# Altium PCB PFC.PcbDoc
Units mil, origin at the board's own origin, x right, y up, seen from the top; angles counter-clockwise.
Board outline 1350.03 x 910.03 mil, 2 copper layers (Top Layer, Bottom Layer); 21 components, 14 nets, 66 pads, 0 vias.
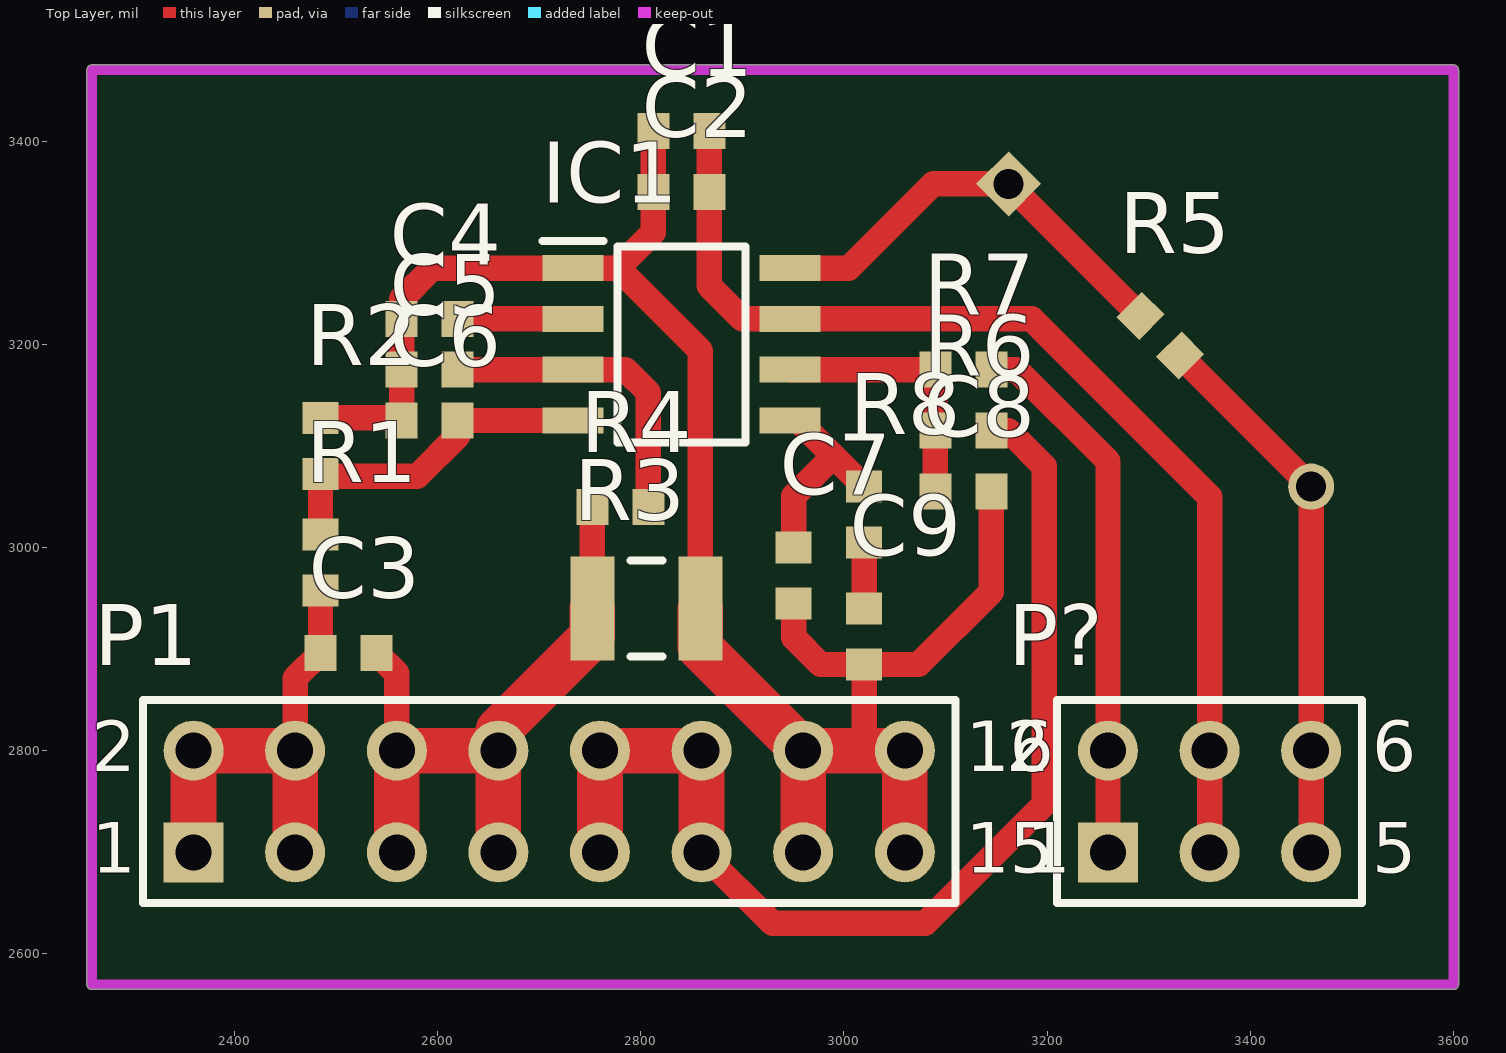
[diagram p0: Top Layer view]
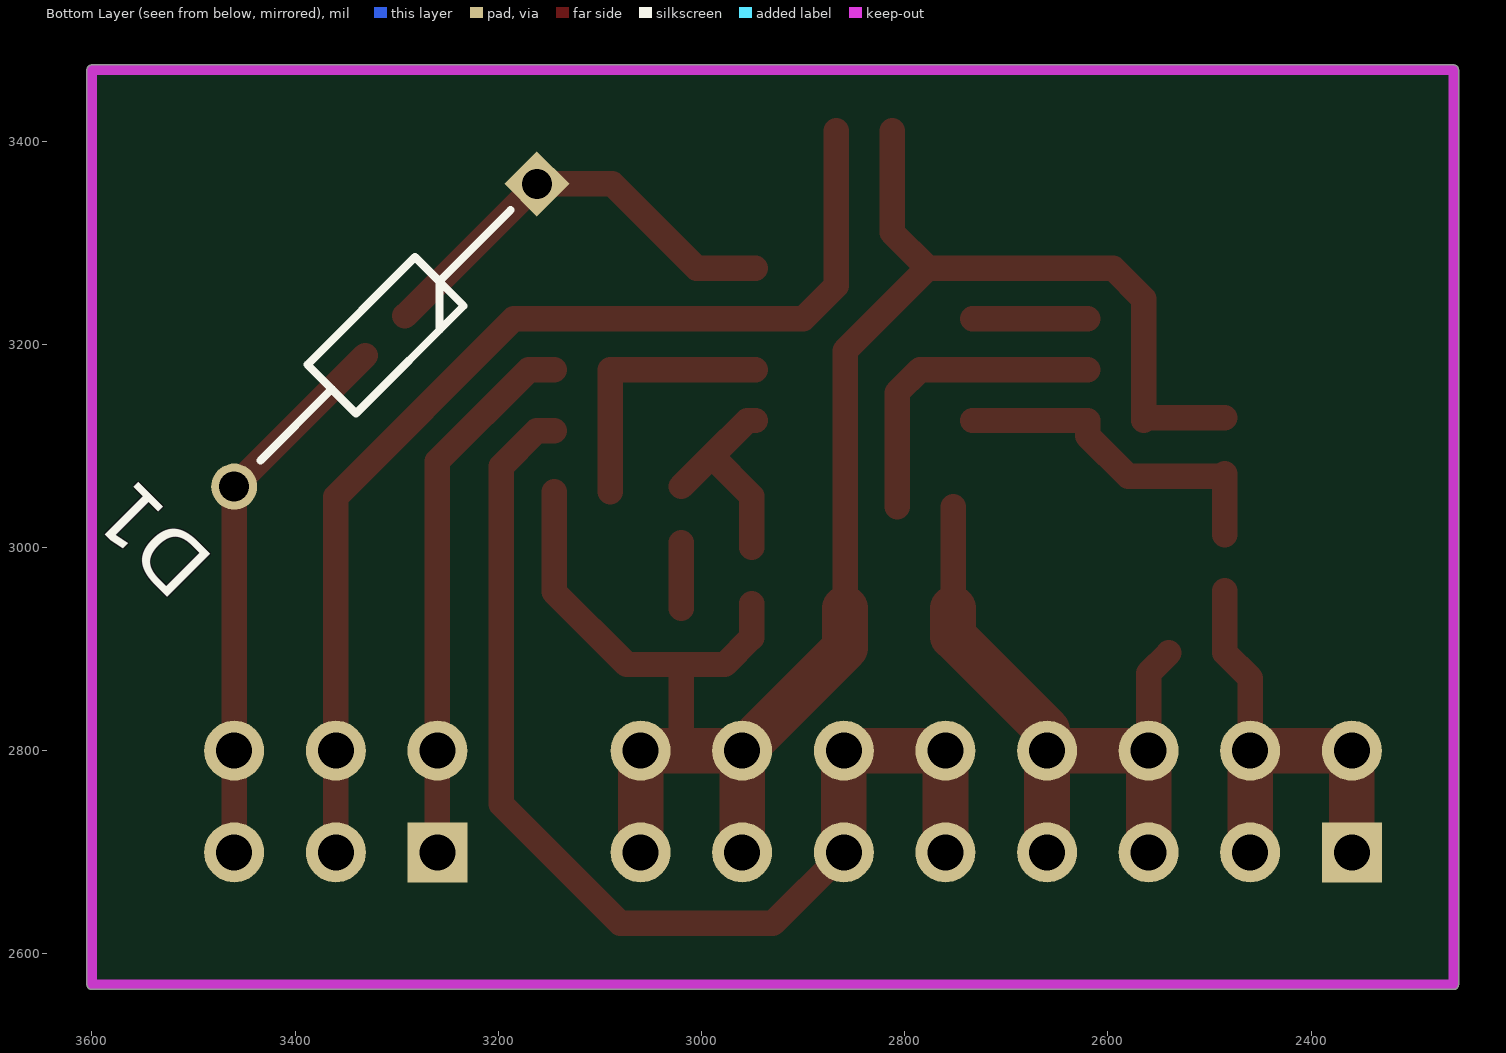
[diagram p1: Bottom Layer view, seen from below]

## Layer stack, top to bottom
Top Solder: solder mask 0.4, Solder Resist, Dk 3.5
Top Layer: signal copper 1.4
Dielectric 1: dielectric 12.6, FR-4, Dk 4.8
Bottom Layer: signal copper 1.4
Bottom Solder: solder mask 0.4, Solder Resist, Dk 3.5

## Board outline
2260,2564.99 cw(c2260,2570) 2254.99,2570 2254.99,3470 cw(c2260,3470) 2260,3475.01 3600,3475.01 cw(c3600,3470) 3605.01,3470 3605.01,2570 cw(c3600,2570) 3600,2564.99

## Design rules (kind name [scope] priority, off if disabled: settings)
Clearance [All] p1: gap=10 ignorepadtopadclearanceinfootprint=FALSE except(0: Arc-Hole Track-Hole SMDPad-Hole THPad-Hole Via-Hole Fill-Hole Poly-Hole Region-Hole Text-Hole)
PolygonConnect [All] p1: connectstyle=Relief reliefconductorwidth=10 reliefentries=4 polygonreliefangle="90 Angle" airgapwidth=10
RoomDefinition PFC [InComponentClass('PFC')] p1: confinementstyle=ConfineIn formatcopy=TRUE lockcomponents=FALSE outline 2260,2570 3600,2570 3600,3470 2260,3470
RoutingVias [All] p1: holewidth=28 width=50 viastyle="Through Hole" minholewidth=28 minwidth=50 maxholewidth=28 maxwidth=50
SolderMaskExpansion [All] p1: expansion=4
Width [All] p1: maxlimit=50 minlimit=10 preferedwidth=25 bottomlayer_maxwidth=10 bottomlayer_prefwidth=10 minimp=50.000000 maximp=50.000000 favimp=50.000000
30 further rules are at their usual default settings.

## Components (designator, comment, footprint, x,y, rotation, side; value= is the part's Value field where it differs from the comment)
C1 "Cap" 1608[0603] 2840,3410 r0 top value=0.01uF
C2 "Cap" 1608[0603] 2840,3350 r0 top value=10uF
C3 "Cap" 1608[0603] 2512.44,2896.26 r180 top value=102
C4 "Cap" 1608[0603] 2592.44,3225 r0 top value=1100pF
C5 "Cap" 1608[0603] 2592.44,3175 r0 top value=1000pF
C6 "Cap" 1608[0603] 2592.44,3125 r0 top value=100pF
C7 "Cap" 1608[0603] 2950.71,2972.44 r90 top value=0.33uF
C8 "Cap" 1608[0603] 3117.56,3055 r180 top value=820pF
C9 "Cap Pol1" 1608[0603] 3020,2912.44 r270 top value=3.3uF
D1 "1N4148" DIOAD1068W53L380D172 3162.12,3357.88 r315 bottom
IC1 "UCC28019D" SOIC127P600X175-8N 2840.12,3200 r0 top
P1 "Header 8X2" HDR2X8 2360,2700 r0 top
P? "Header 3X2" HDR2X3 3260,2700 r0 top
R1 "Res1" 1608[0603] 2484.88,2985 r90 top value=1.8M
R2 "Res1" 1608[0603] 2484.88,3100 r90 top value=100K
R3 "Res1" C1210 2805.59,2940 r180 top value=50m
R4 "Res1" 1608[0603] 2780,3040 r180 top value=220
R5 "Res1" 1608[0603] 3311.51,3208.49 r315 top value=3R3
R6 "Res1" 1608[0603] 3117.56,3115 r0 top value=3R3
R7 "Res1" 1608[0603] 3117.56,3175 r180 top value=3R3
R8 "Res1" 1608[0603] 3020,3032.44 r90 top value=47K

## Footprints (in the part's own frame and the unit in brackets; to place one, negate y for a bottom-side part, rotate by r counter-clockwise, add the part's x,y. Pads: shape width x height; smd on the part's side, far side on the other; paste and mask are expansions set on the pad)
1608[0603] [mm] "Chip Capacitor, Body 1.6x0.8mm, IPC High Density"
  rect 0.8x0.9 smd: 1(-0.7,0) 2(0.7,0)
  body extent -0.87,-0.48 0.87,0.48, height 1.3
C1210 [mm] "Chip Capacitor, Body 3.2x2.5mm, IPC High Density"
  rect 1.1x2.6 smd: 1(-1.35,0) 2(1.35,0)
  silkscreen extent -0.4,-1.2 0.4,1.2, body extent -1.7,-1.35 1.7,1.35, height 1.3
DIOAD1068W53L380D172 [mm]
  rect 1.15x1.15 hole 0.75: 1(0,0)
  round 1.15 hole 0.75: 2(10.7,0)
  silkscreen extent 0.92,-0.86 9.77,0.86, body extent -0.26,-0.95 10.95,0.95, height 1.9
HDR2X3 [mm] "Connector; Header; 3x2 Position"
  rect 1.5x1.5 hole 0.9: 1(0,0)
  round 1.5 hole 0.9: 2(0,2.54) 3(2.54,0) 4(2.54,2.54) 5(5.08,0) 6(5.08,2.54)
  silkscreen extent -1.27,-1.27 6.35,3.81
HDR2X8 [mm] "Connector; Header; 8x2 Position"
  rect 1.5x1.5 hole 0.9: 1(0,0)
  round 1.5 hole 0.9: 2(0,2.54) 3(2.54,0) 4(2.54,2.54) 5(5.08,0) 6(5.08,2.54) 7(7.62,0) 8(7.62,2.54) 9(10.16,0) 10(10.16,2.54) 11(12.7,0) 12(12.7,2.54) 13(15.24,0) 14(15.24,2.54) 15(17.78,0) 16(17.78,2.54)
  silkscreen extent -1.27,-1.27 19.05,3.81
SOIC127P600X175-8N [mm]
  rect 1.525x0.65 smd: 1(-2.712,1.905) 2(-2.712,0.635) 3(-2.712,-0.635) 4(-2.712,-1.905) 5(2.712,-1.905) 6(2.712,-0.635) 7(2.712,0.635) 8(2.712,1.905)
  silkscreen extent -3.47,-2.45 1.6,2.58, body extent -3,-2.45 3,2.45, height 1.75

## Part data
C1 C2 C3 C4 C5 C6 C7 C8: "Capacitor", LatestRevisionDate=17-Jul-2002, LatestRevisionNote="Re-released for DXP Platform.", PackageDescription="Radial Cap, Thru-Hole; 2 Leads; 0.3 in Pin Spacing", PackageReference=RAD-0.3, Published=8-Jun-2000, Publisher="Altium Limited"
C9: "Polarized Capacitor (Radial)", LatestRevisionDate=17-Jul-2002, LatestRevisionNote="Re-released for DXP Platform.", PackageDescription="Polarized Capacitor (Radial); 2 Leads", PackageReference=RB7.6-15, Published=8-Jun-2000, Publisher="Altium Limited"
D1: "Diode", Manufacturer_Name="Micro Commercial Components (MCC)", Mouser Part Number=833-1N4148, Datasheet Link=https://componentsearchengine.com/Datasheets/1/1N4148.pdf, Manufacturer_Part_Number=1N4148, Mouser Price/Stock=https://www.mouser.com/Search/Refine.aspx?Keyword=833-1N4148
IC1: "Integrated Circuit", Manufacturer_Name="Texas Instruments", RS Part Number=0404342P, Datasheet Link=http://docs-emea.rs-online.com/webdocs/0abc/0900766b80abcb30.pdf, Height=1.75mm, Manufacturer_Part_Number=UCC28019D, RS Price/Stock=http://uk.rs-online.com/web/p/products/0404342P
P1: "Header, 8-Pin, Dual row", LatestRevisionDate=17-Jul-2002, LatestRevisionNote="Re-released for DXP Platform.", Publisher="Altium Limited"
P?: "Header, 3-Pin, Dual row", LatestRevisionDate=17-Jul-2002, LatestRevisionNote="Re-released for DXP Platform.", Publisher="Altium Limited"
R1 R2 R3 R4 R5 R6 R7 R8: "Resistor", LatestRevisionDate=17-Jul-2002, LatestRevisionNote="Re-released for DXP Platform.", PackageDescription="Axial Device, Thru-Hole; 2 Leads; 0.3 in Pin Spacing", PackageReference=AXIAL-0.3, Published=8-Jun-2000, Publisher="Altium Limited"

## Nets (pads, with @x,y where several pads share a name; then routed paths per layer and width w, separated by ;. In a path a pad name is that pad's centre, name@x,y a point inside that pad or via, vN(x,y) a via of type N, cw(c..) or ccw(c..) an arc to the next point about the centre after c; other vN are vias at no path point)
+12: C1.2 C2.2 IC1.7 P?.3 P?.4 | length 1080.9
  Top Layer w25: C1.2 C2.2 2867.56,3257.44 2900,3225 IC1.7 3185,3225 3360,3050 P?.4 P?.3
CTRL: P?.1 P?.2 R7.1 | length 537.2
  Top Layer w25: R7.1 3170,3175 3260,3085 P?.2 P?.1
GATE: D1.2 P?.5 P?.6 R5.2 | length 542.4
  Top Layer w25: R5.2 D1.2 P?.6 P?.5
GND: C1.1 C2.1 C4.1 C5.1 C6.1 C7.1 C8.1 C9.2 IC1.1 P1.13 P1.14 P1.15 P1.16 R2.2 R3.1 | length 1888.2
  Top Layer w25: R2.2 2562.32,3127.56 C6.1 C5.1 C4.1 2564.88,3244.88 2595,3275 IC1.1 2777.44,3275 ; C1.1 C2.1 2812.44,3310 2777.44,3275 ; R3.1 2858.74,3193.7 2777.44,3275 ; C7.1 2950.71,2911.26 2977.09,2884.88 C9.2 ; 3020,2800 C9.2 ; P1.15@3060,2690 P1.15 ; C8.1 3145.12,2956.38 3073.62,2884.88 C9.2
  Top Layer w45: R3.1 2858.74,2901.26 P1.14 ; P1.13 P1.14 ; P1.15 P1.16 3020,2800 P1.14
NetC4_2: C4.2 IC1.2 | length 113.3
  Top Layer w25: C4.2 IC1.2
NetC5_2: C5.2 IC1.3 R4.1 | length 309.3
  Top Layer w25: C5.2 IC1.3 2785,3175 2807.56,3152.44 R4.1
NetC6_2: C6.2 IC1.4 R1.2 R2.1 | length 340.9
  Top Layer w25: R1.2 R2.1 2487.32,3070 2580,3070 2620,3110 C6.2 IC1.4
NetC7_2: C7.2 IC1.5 R8.2 | length 206.3
  Top Layer w25: IC1.5 2955,3125 2990,3090 ; C7.2 2950.71,3050.71 2990,3090 ; R8.2 2990,3090
NetC8_2: C8.2 IC1.6 R6.1 R7.2 | length 263.1
  Top Layer w25: IC1.6 R7.2 R6.1 C8.2
NetC9_1: C9.1 R8.1 | length 64.9
  Top Layer w25: C9.1 R8.1
NetD1_1: D1.1 IC1.8 R5.1 | length 433.3
  Top Layer w25: IC1.8 3005,3275 3087.88,3357.88 D1.1 R5.1
VIN: C3.2 P1.1 P1.2 P1.3 P1.4 R1.1 | length 467.7
  Top Layer w25: P1.4 2460,2871.38 C3.2 R1.1
  Top Layer w45: P1.1 P1.2 P1.4 P1.3
VIN_ISENCE: C3.1 P1.5 P1.6 P1.7 P1.8 R3.2 R4.2 | length 682.8
  Top Layer w25: C3.1 2560,2876.26 P1.6 ; R3.2 R4.2
  Top Layer w45: P1.5 P1.6 P1.8 ; P1.7 P1.8 ; R3.2 2752.44,2912.44 2660,2820 P1.8
VOUT: P1.9 P1.10 P1.11 P1.12 R6.2 | length 1114
  Top Layer w25: P1.11 2930,2630 3080,2630 3197.12,2747.12 3197.12,3080 3162.12,3115 R6.2
  Top Layer w45: P1.9 P1.10 P1.12 P1.11

## Keep-outs
Keep-Out Layer:
  lines w10: 2260,2570 3600,2570 3600,3470 2260,3470 2260,2570

## Text inside footprints (layer, text, board x,y; h text height)
P1: Top Overlay "2" at 2260,2780 h50; Top Overlay "1" at 2260,2680 h50; Top Overlay "15" at 3120,2680 h50; Top Overlay "16" at 3120,2780 h50
P?: Top Overlay "6" at 3520,2780 h50; Top Overlay "5" at 3520,2680 h50; Top Overlay "2" at 3160,2780 h50; Top Overlay "1" at 3180,2680 h50